# EAGLE board autism_ray_board (EAGLE 9.6.2)
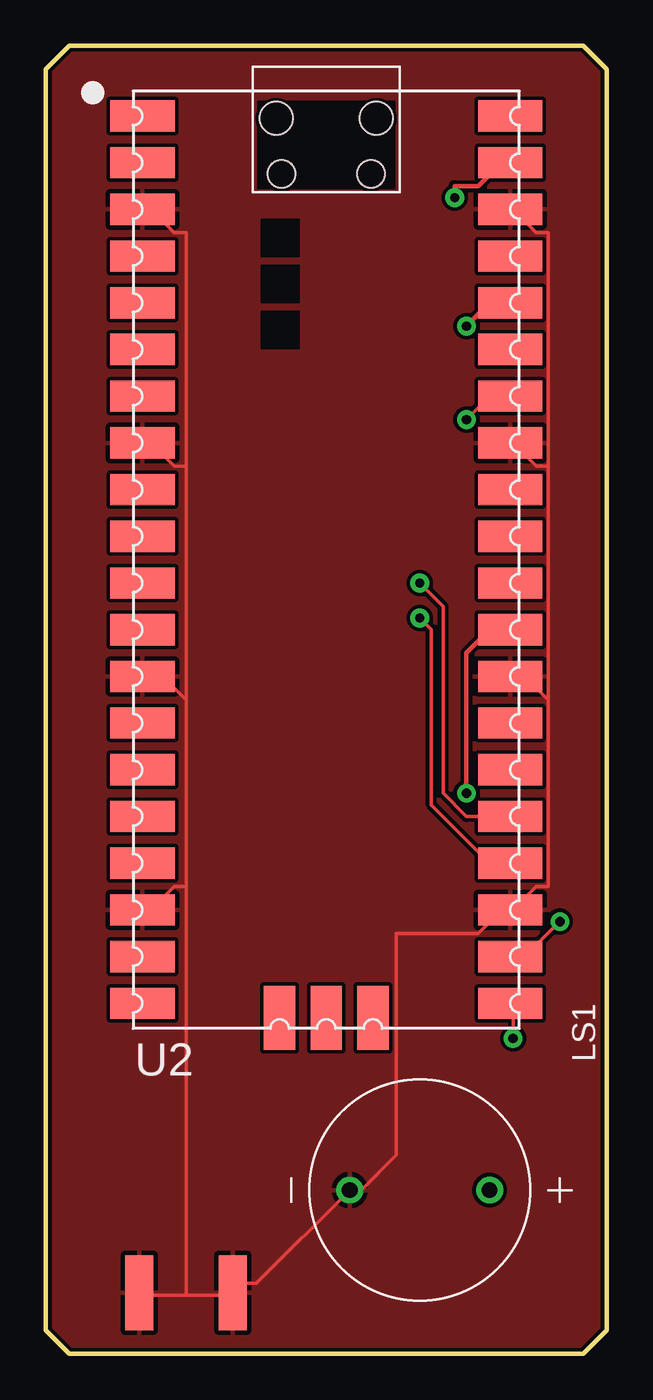
[diagram p0: board, top side]
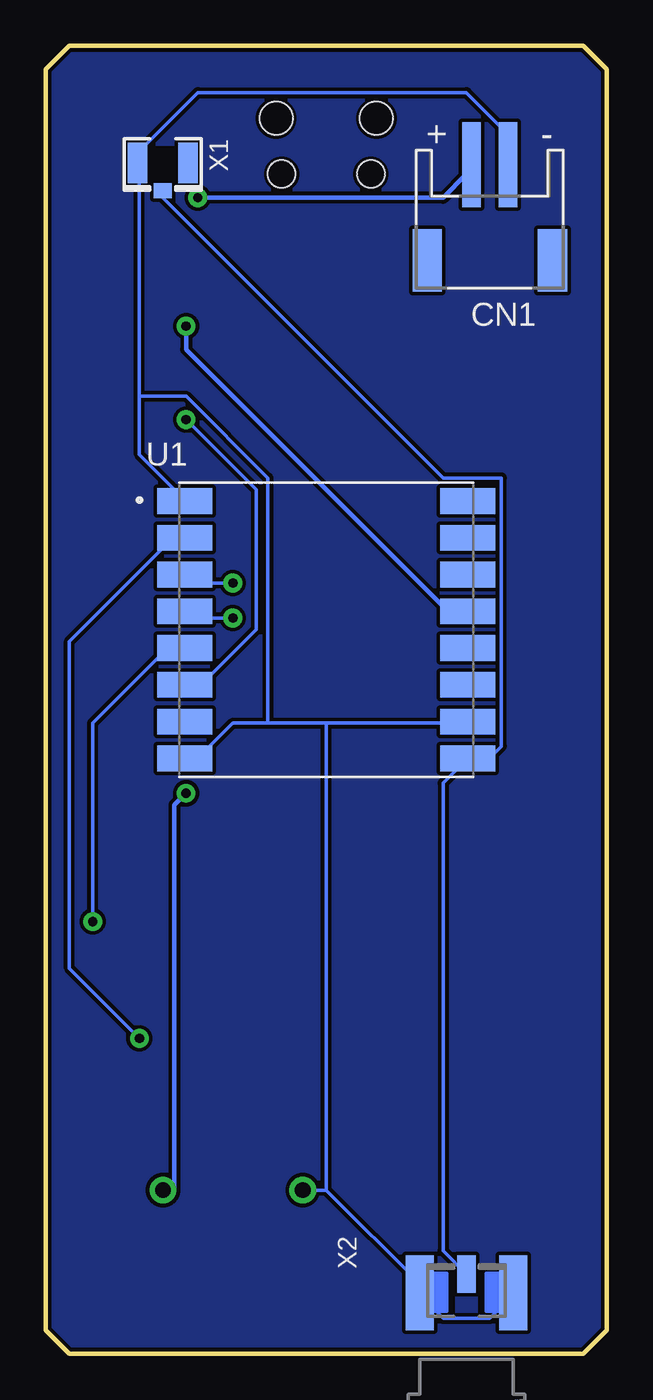
[diagram p1: board, bottom side, seen from below]

Size 30.48 x 71.12 mm. Coordinates in mm from the lower left corner, seen from the top.
Outline: 1.27,0 29.21,0 30.48,1.27 30.48,69.85 29.21,71.12 1.27,71.12 0,69.85 0,1.27 1.27,0
Copper layers (1*16): Top 0.035mm / dielectric 1.5mm / Bottom 0.035mm
Design rules "SparkFun": minimum track width 8mil, minimum drill 20mil, track to track 8mil, track to pad 8mil, pad to pad 8mil, via to via 8mil, smd to smd 8mil, copper to edge 8mil, drill to drill 8mil, minimum pad ring 12mil, minimum via ring 10mil, stop-mask expansion 4mil, vias tented up to drill 20mil, thermal gap 10mil

## Footprints (pad centres in the part's own frame; a part is rotated, then mirrored left to right if it is on the bottom)
JST-PH-2-SMT-RA = smd 1 x 4.6: 1 1,-3.7; 2 -1,-3.7 | smd 1.6 x 3.4: NC1 -3.4,1.5; NC2 3.4,1.5
XDCR_AI-1223-TWT-12V-R = drill 0.85: N 0,-3.8; P 0,3.8
XCVR_RFM95W-915S2 = smd 3 x 1.4: 1 -7.7,7; 2 -7.7,5; 3 -7.7,3; 4 -7.7,1; 5 -7.7,-1; 6 -7.7,-3; 7 -7.7,-5; 8 -7.7,-7; 9 7.7,-7; 10 7.7,-5; 11 7.7,-3; 12 7.7,-1; 13 7.7,1; 14 7.7,3; 15 7.7,5; 16 7.7,7
PICO-PKG-SMD = smd 3.5 x 1.7: P$1 -10,24.13; P$2 -10,21.59; P$3 -10,19.05; P$4 -10,16.51; P$5 -10,13.97; P$6 -10,11.43; P$7 -10,8.89; P$8 -10,6.35; P$9 -10,3.81; P$10 -10,1.27; P$11 -10,-1.27; P$12 -10,-3.81; P$13 -10,-6.35; P$14 -10,-8.89; P$15 -10,-11.43; P$16 -10,-13.97; P$17 -10,-16.51; P$18 -10,-19.05; P$19 -10,-21.59; P$20 -10,-24.13; P$21 10,-24.13; P$22 10,-21.59; P$23 10,-19.05; P$24 10,-16.51; P$25 10,-13.97; P$26 10,-11.43; P$27 10,-8.89; P$28 10,-6.35; P$29 10,-3.81; P$30 10,-1.27; P$31 10,1.27; P$32 10,3.81; P$33 10,6.35; P$34 10,8.89; P$35 10,11.43; P$36 10,13.97; P$37 10,16.51; P$38 10,19.05; P$39 10,21.59; P$40 10,24.13 | smd 1.7 x 3.5: P$41 -2.54,-24.925; P$42 0,-24.925; P$43 2.54,-24.925 | hole 1.8: -2.725,24; 2.725,24 | hole 1.5: -2.425,20.97; 2.425,20.97
U.FL = smd 2.2 x 1.05: 1 0,1.375; 2 0,-1.375 | smd 0.8 x 1: 3 1.525,0
SMA_EDGELAUNCH_UFL = smd 4.064 x 1.524: GND@1 2.032,-2.54; GND@2 2.032,2.54 | smd 4.064 x 1.524 bottom: GND@3 2.032,2.54; GND@4 2.032,-2.54 | smd 2.032 x 1.016: P 3.048,0

## Placement (x,y rotation side)
CN1  [JST-PH-2-SMT-RA]  6.35,60.96 180 bottom
LS1  AI-1223-TWT-12V-R  [XDCR_AI-1223-TWT-12V-R]  20.32,8.89 270 top
U1  RFM95W-915S2  [XCVR_RFM95W-915S2]  15.24,39.37 0 bottom
U2  RASPBERRY_PICOSMD  [PICO-PKG-SMD]  15.24,43.18 0 top
X1  [U.FL]  24.13,64.77 270 bottom
X2  [SMA_EDGELAUNCH_UFL]  7.62,1.27 90 bottom

## Library data of the parts
CN1 X1 X2 = adafruit
LS1 = buzzer; AVAILABILITY: In Stock; DESCRIPTION: ELECTRO-MECHANICAL AUDIO INDICATOR; MF: PUI Audio,; MP: AI-1223-TWT-12V-R; PACKAGE: None; PRICE: None; PURCHASE-URL: https://pricing.snapeda.com/search/part/AI-1223-TWT-12V-R/?ref=eda
U1 = RFM95W-915S2; AVAILABILITY: In Stock; DESCRIPTION: 802.15.4 LoRa™ Transceiver Module 915MHz Antenna Not Included Surface Mount; MF: RF Solutions; MP: RFM95W-915S2; PACKAGE: Non Standard RF Solutions; PRICE: None; PURCHASE-URL: https://pricing.snapeda.com/search/part/RFM95W-915S2/?ref=eda
U2 = RpiPico

## Nets
3.3V: U1.13 U2.P$36
ANT: U1.9 X1.3 X2.P
BEEP: LS1.P U2.P$29
CS: U1.5 U2.P$22
GND: CN1.2 LS1.N U1.1 U1.8 U1.10 U2.P$3 U2.P$8 U2.P$13 U2.P$18 U2.P$23 U2.P$28 U2.P$33 U2.P$38 X1.2 X2.GND@1 X2.GND@2 X2.GND@3 X2.GND@4
MISO: U1.2 U2.P$21
MOSI: U1.3 U2.P$25
RST: U1.6 U2.P$34
SCK: U1.4 U2.P$24
SWGND: U2.P$42
VBUS: U2.P$40
VCC: CN1.1 U2.P$39

## Tracks (layer width: path | path; a pad name or v marks a point on that pad's centre or on a via)
3.3V  (via drill 0.51)
  Top 0.203: U2.P$36 24.13,57.15
  Top 0.254: 24.13,57.15 v22.86,55.88
  Bottom 0.203: 8.89,40.64 7.62,40.64 U1.13
  Bottom 0.254: 8.89,40.64 22.86,54.61 v22.86,55.88
ANT
  Bottom 0.203: X1.3 24.13,62.87 8.89,47.62 5.71,47.62 5.71,33.02 6.99,31.75 U1.9 8.89,31.02 8.89,5.59 X2.P
BEEP  (via drill 0.51)
  Top 0.203: U2.P$29 24.13,39.37
  Top 0.254: v22.86,30.48 22.86,38.1 24.13,39.37
  Bottom 0.203: 23.5,8.89 LS1.P
  Bottom 0.254: 23.5,8.89 23.5,29.84 v22.86,30.48
CS  (via drill 0.51)
  Top 0.203: v27.94,23.5 26.04,21.59 U2.P$22
  Bottom 0.203: v27.94,23.5 27.94,34.29 24.13,38.1 23.5,38.1 U1.5
GNC
  pour Bottom: 1.27,0 0,1.27 0,69.85 1.27,71.12 29.21,71.12 30.48,69.85 30.48,1.27 29.21,0
GND
  Top 0.203: 27.3,35.56 27.3,25.4 26.67,25.4 25.4,24.13 U2.P$23 24.77,24.13 23.5,22.86 19.05,22.86 19.05,10.79 17.14,8.89 LS1.N 11.43,3.81 10.16,3.81 X2.GND@3 10.16,3.18 7.62,3.18 | 27.3,35.56 26.04,36.83 U2.P$28 | 27.3,48.26 26.67,48.26 25.4,49.53 U2.P$33 | 27.3,35.56 27.3,48.26 | 27.3,48.26 27.3,60.96 26.67,60.96 25.4,62.23 U2.P$38 | 7.62,3.18 5.08,3.18 X2.GND@4 | 7.62,25.4 6.99,25.4 5.71,24.13 U2.P$18 | 7.62,35.56 7.62,25.4 | 7.62,35.56 6.35,36.83 U2.P$13 | 7.62,48.26 6.99,48.26 5.71,49.53 U2.P$8 | 7.62,35.56 7.62,48.26 | 7.62,48.26 7.62,60.96 6.99,60.96 5.71,62.23 U2.P$3 | 7.62,25.4 7.62,3.18
  Bottom 0.203: 18.41,34.29 20.32,34.29 22.86,31.75 U1.8 | 18.41,34.29 15.24,34.29 | 15.24,34.29 7.62,34.29 U1.10 | 25.4,52.07 25.4,48.89 23.5,46.99 U1.1 | 25.4,52.07 25.4,64.77 | 25.4,64.77 25.4,65.41 22.23,68.58 7.62,68.58 5.71,66.67 5.71,64.77 CN1.2 | 25.4,64.77 X1.2 | 18.41,34.29 18.41,47.62 22.86,52.07 25.4,52.07 | 15.24,8.89 LS1.N | 15.24,8.89 10.16,3.81 X2.GND@3 10.16,3.18 8.89,1.9 6.35,1.9 5.08,3.18 X2.GND@4 | 15.24,8.89 15.24,34.29
  pour Top: 1.27,0 0,1.27 0,69.85 1.27,71.12 29.21,71.12 30.48,69.85 30.48,1.27 29.21,0
MISO  (via drill 0.51)
  Top 0.203: v25.4,17.14 25.4,19.05 U2.P$21
  Bottom 0.203: v25.4,17.14 29.21,20.96 29.21,38.73 24.13,43.81 23.5,43.81 U1.2
MOSI  (via drill 0.51)
  Top 0.203: v20.32,41.91 21.59,40.64 21.59,30.48 22.86,29.21 U2.P$25
  Bottom 0.203: v20.32,41.91 22.86,41.91 U1.3
RST  (via drill 0.51)
  Top 0.203: v22.86,50.8 24.13,52.07 U2.P$34
  Bottom 0.203: v22.86,50.8 19.05,46.99 19.05,39.37 21.59,36.83 22.86,36.83 U1.6
SCK  (via drill 0.51)
  Top 0.203: v20.32,40 20.95,39.37 20.95,29.84 24.13,26.67 U2.P$24
  Bottom 0.203: v20.32,40 22.86,40 U1.4
VCC  (via drill 0.51)
  Top 0.203: 24.77,64.77 U2.P$39
  Top 0.254: 24.77,64.77 23.5,63.5 22.23,63.5 v22.23,62.87
  Bottom 0.254: v22.23,62.87 8.89,62.87 7.62,64.14 CN1.1